# Altium PCB OSSI-1 Analog Temp Module.PcbDoc
Units mil, origin at the board's own origin, x right, y up, seen from the top; angles counter-clockwise.
Board outline 400 x 850 mil, 2 copper layers (Top, Bottom), stack 61.811 mil thick; 8 components, 6 nets, 18 pads, 1 vias.
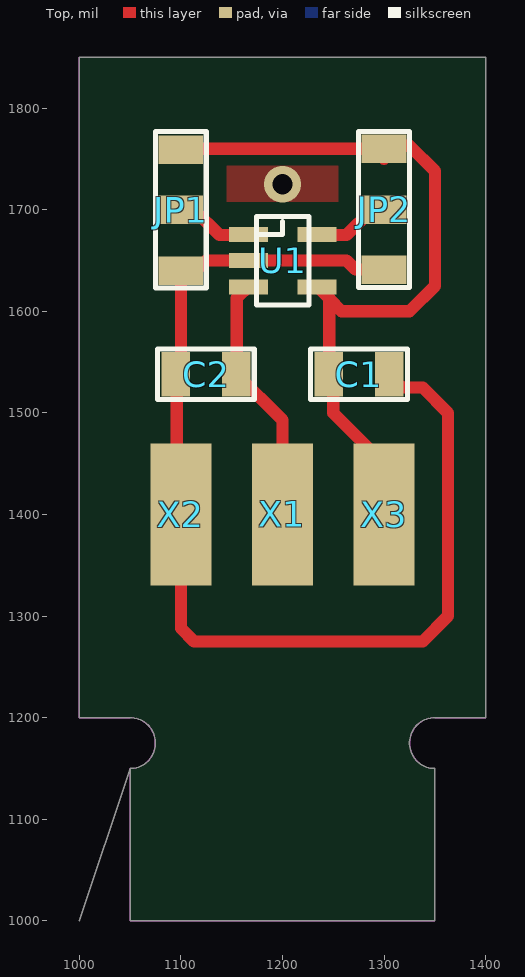
[diagram p0: Top view]
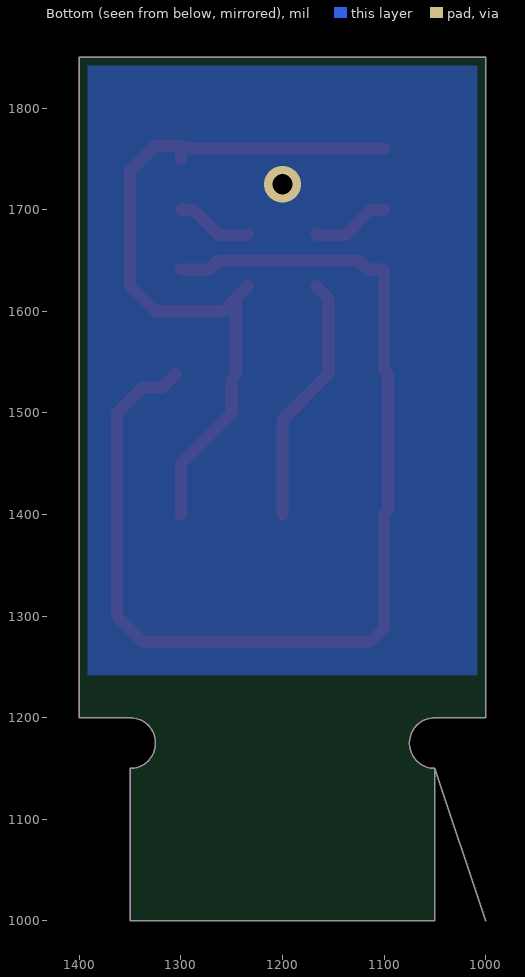
[diagram p1: Bottom view, seen from below]

## Layer stack, top to bottom
Top Solder: solder mask 0.4, Solder Resist, Dk 3.5
Top: signal copper 1.378
Dielectric 1: core 59.0551, FR-4, Dk 4.8
Bottom: signal copper 1.378
Bottom Solder: solder mask 0.4, Solder Resist, Dk 3.5

## Board outline
1050,1150 1050,1100 1050,1000 1350,1000 1350,1100 1350,1150 cw(c1350,1175) 1350,1200 1400,1200 1400,1850 1000,1850 1000,1250 1000,1200 1050,1200 cw(c1050,1175) 1000,1000

## Design rules (kind name [scope] priority, off if disabled: settings)
Clearance mdViaVia [IsVia vs IsVia] p1: gap=8
Clearance mdPadVia [IsPad vs IsVia] p2: gap=8
Clearance mdPadPad [IsPad vs IsPad] p3: gap=8
Clearance mdWireVia [(InLayerClass('Signal Layers') AND IsTrack) vs IsVia] p4: gap=8
Clearance mdWirePad [(InLayerClass('Signal Layers') AND IsTrack) vs IsPad] p5: gap=8
Clearance mdWireWire [(InLayerClass('Signal Layers') AND IsTrack) vs (InLayerClass('Signal Layers') AND IsTrack)] p6: gap=8
Clearance [All] p7: gap=8
HoleSize [All] p1: absolutevalues=TRUE maxlimit=100000 minlimit=24 maxpercent=80.000 minpercent=20.000
HoleToHoleClearance [All] p1: gap=8 allowstackedmicrovias=TRUE
PolygonConnect ThermalVias [IsVia] p1: connectstyle=Direct reliefconductorwidth=10 reliefentries=4 polygonreliefangle="90 Angle" airgapwidth=10
PolygonConnect [All] p2: connectstyle=Relief reliefconductorwidth=10 reliefentries=4 polygonreliefangle="90 Angle" airgapwidth=10
RoutingVias [All] p1: holewidth=28 width=50 viastyle="Through Hole" minholewidth=28 minwidth=50 maxholewidth=28 maxwidth=50
SilkToSilkClearance [All] p1 off: silktosilkclearance=10
SilkToSolderMaskClearance [IsPad] p1 off: minsilkscreentomaskgap=10 clearancetoexposedcopper=TRUE
SolderMaskExpansion [All] p1: expansion=4
Width [All] p1: maxlimit=100000 minlimit=10 preferedwidth=10
26 further rules are at their usual default settings.

## Components (designator, comment, footprint, x,y, rotation, side; value= is the part's Value field where it differs from the comment)
C1 "100nF" C0603(1608) 1275,1538 r0 top
C2 "100nF" C0603(1608) 1125,1538 r180 top
JP1 "" JP2SMD0603 1100,1700 r270 top
JP2 "" JP2SMD0603 1300,1700 r90 top
U1 "LM94022" SC70-5 1200,1650 r270 top
X1 "P-PAD-S" P-PAD-S 1200,1400 r90 top
X2 "P-PAD-S" P-PAD-S 1100,1400 r90 top
X3 "P-PAD-S" P-PAD-S 1300,1400 r90 top

## Footprints (in the part's own frame and the unit in brackets; to place one, negate y for a bottom-side part, rotate by r counter-clockwise, add the part's x,y. Pads: shape width x height; smd on the part's side, far side on the other; paste and mask are expansions set on the pad)
C0603(1608) [mil] "C0603(1608)"
  rect 28x44 smd: 1(-29.53,0) 2(30,0)
  silkscreen extent -47,-25 48,25
JP2SMD0603 [mil] "JP2SMD0603"
  rect 28x44 smd: 1(-59.06,0) 2(0,0) 3(60,0)
  silkscreen extent -77,-25 77,25
P-PAD-S [mil] "P-PAD-S"
  rect 140x60 smd: 1(0,0)
SC70-5 [mil] "SC70-5"
  rect 15x38 smd: P$1(-25.59,-33.46) P$2(0,-33.46) P$3(26,-33.46) P$4(26,34) P$5(-25.59,34)
  silkscreen extent -43,-26 44,26

## Part data
C1 C2: library part C0603(1608)
JP1 JP2: library part JP2SMD0603
U1: library part SC70-5

## Via types
v1: diameter 36/36 (per signal layer), hole 20, Top to Bottom, 1 vias

## Nets (pads, with @x,y where several pads share a name; then routed paths per layer and width w, separated by ;. In a path a pad name is that pad's centre, name@x,y a point inside that pad or via, vN(x,y) a via of type N, cw(c..) or ccw(c..) an arc to the next point about the centre after c; other vN are vias at no path point)
3.3VOBC: C1.1 JP1.1 JP2.3 U1.P$4 X3.1 | length 785.5
  Top w12: JP1.1@1100,1760 JP2.3 ; X3.1 1300,1450 1250,1500 1250,1533 1246,1538 1246,1613 1234,1625 1258,1600 1325,1600 1350,1625 1350,1738 1325,1763 1300,1763 JP2.3 ; JP2.3 1300,1750 JP2.3
GND: C1.2 C2.2 JP1.3 JP2.1 U1.P$2 X2.1 | length 1115.7
  Top w12: JP2.1@1300,1641 1272,1641 1263,1650 1167,1650 1125,1650 1116,1641 1100,1641 1100,1543 1096,1538 1096,1405 X2.1 1100,1288 1113,1275 1338,1275 1363,1300 1363,1500 1338,1525 1318,1525 C1.2
N$1: JP1.2 U1.P$1 | length 77.8
  Top w12: JP1.2 1113,1700 1138,1675 1166,1675 U1.P$1@1167,1676
N$2: JP2.2 U1.P$5 | length 76.8
  Top w12: U1.P$5@1234,1676 1235,1675 1263,1675 1288,1700 JP2.2
N$3: C2.1 U1.P$3 X1.1 | length 248.6
  Top w12: U1.P$3@1167,1625 1155,1613 1155,1538 1200,1493 X1.1
THERMAL: 
  other v1: 1200,1725

## Polygon pours and split planes (outlines as drawn)
THERMAL on Bottom "Bottom-THERMAL" (solid, remove dead copper, pour order 2): 992,1858 1408,1858 1408,1242 992,1242
THERMAL on Top "Top-THERMAL" (solid, remove dead copper, pour order 4): 1145,1743 1145,1708 1255,1708 1255,1743

## Keep-outs
Keep-Out Layer:
  lines w0: 1000,1200 1000,1250 1000,1850 1400,1850 1400,1200 1350,1200 ccw(c1350,1175) 1350,1150 1350,1100 1350,1000 1050,1000 1050,1100 1050,1150 ccw(c1050,1175) 1050,1200 1000,1200

## Silkscreen, mask and mechanical layers (free items; w line width, h text height)
Dimension:
  lines w0: 1000,1200 1000,1250 1000,1850 1400,1850 1400,1200 1350,1200 ccw(c1350,1175) 1350,1150 1350,1100 1350,1000 1050,1000 1050,1100 1050,1150 ccw(c1050,1175) 1050,1200 1000,1200
Document:
  text "GND" at 1125,1050 h34 r90
  text "TEMP" at 1225,1050 h34 r90
  text "3.3V" at 1313,1050 h34 r90

## Text inside footprints (layer, text, board x,y; h text height)
C1: tNames ">NAME" at 1240,1573 h77.5; tValues ">VALUE" at 1240,1458 h77.5
C2: tNames ">NAME" at 1160,1503 h77.5 r180; tValues ">VALUE" at 1160,1618 h77.5 r180
JP1: tNames ">NAME" at 1075,1600 h77.5 r270
JP2: tNames ">NAME" at 1325,1800 h77.5 r90
U1: tNames ">NAME" at 1072.05,1701.18 h77.5; tValues ">VALUE" at 1046.46,1547 h77.5
X1: tNames ">NAME" at 1150,1300 h77.5 r90; tValues ">VALUE" at 1300,1300 h77.5 r90
X2: tNames ">NAME" at 1050,1300 h77.5 r90; tValues ">VALUE" at 1200,1300 h77.5 r90
X3: tNames ">NAME" at 1250,1300 h77.5 r90; tValues ">VALUE" at 1400,1300 h77.5 r90